# Altium PCB STM32F103ZET6.PCBDOC (part 4 of 4)
Units mil, origin at the board's own origin, x right, y up, seen from the top; angles counter-clockwise.
Board outline 4000 x 2280 mil, 2 copper layers (Top Layer, Bottom Layer); 80 components, 152 nets, 495 pads, 75 vias.
Unrouted connection lines stored in the file: 4.
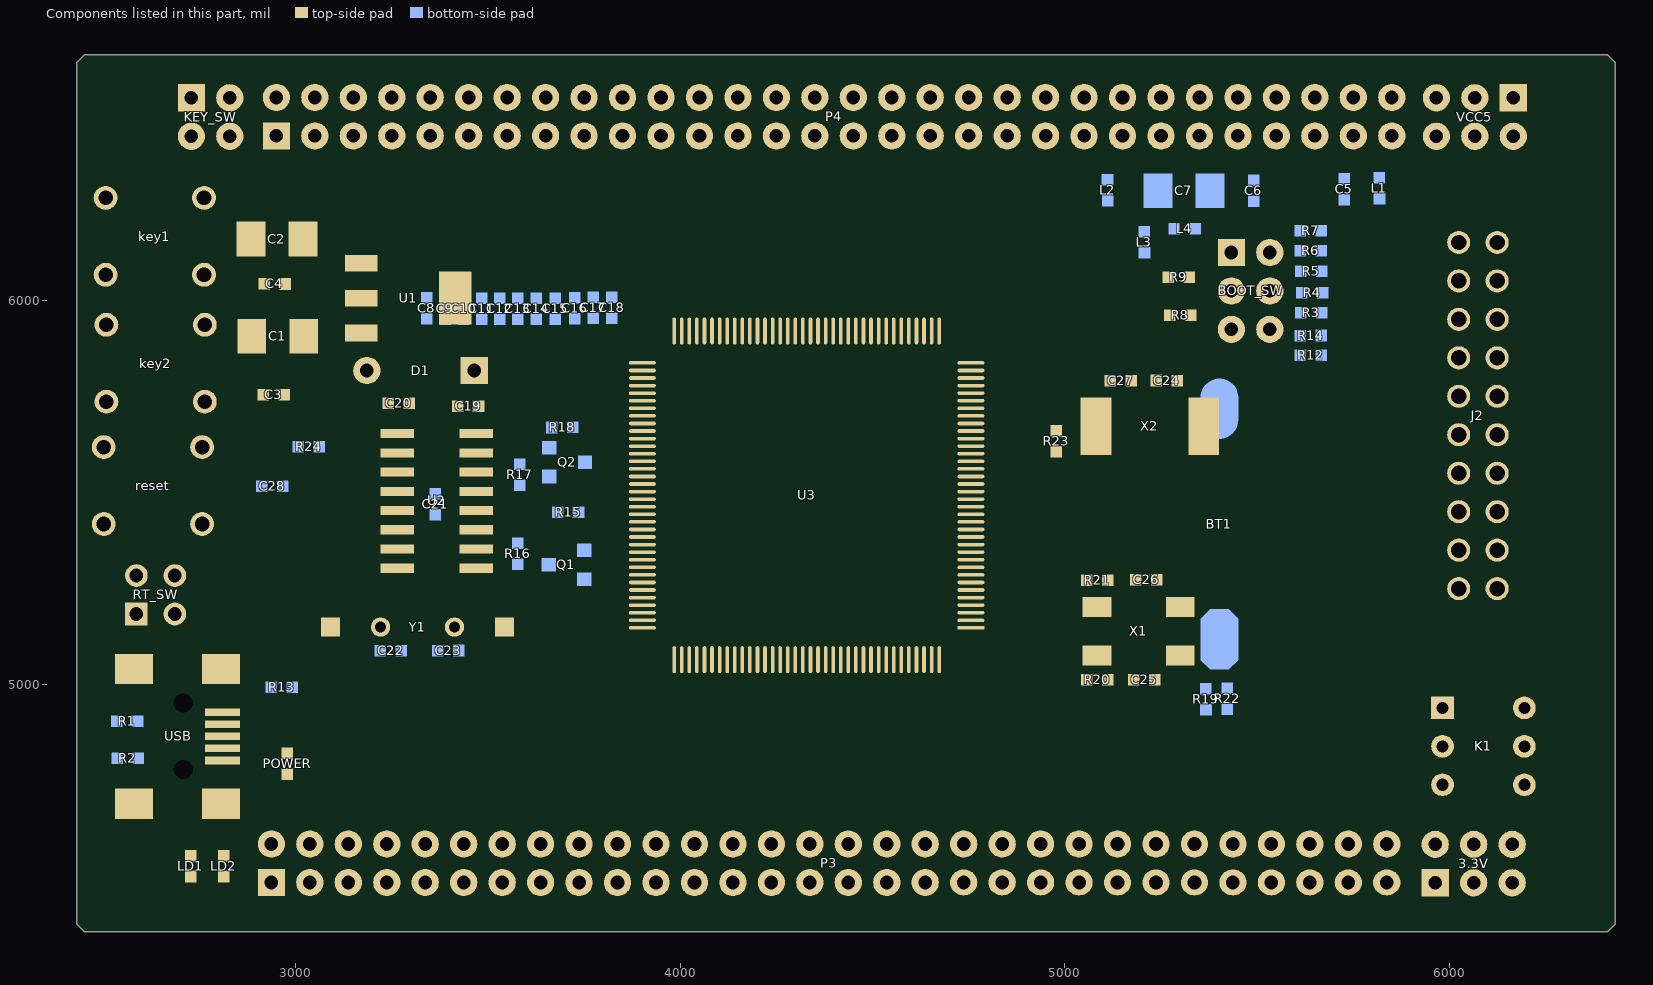
[diagram p4: the components of this part, seen from the top]

## Silkscreen, mask and mechanical layers (free items; w line width, h text height)
Top Overlay:
  drawing of 708 lines, arcs and shapes, not listed
  text "5V" at 6224,6557 h45 r270
  text "GND" at 6225,6462 h45 r270
  text "VREF-/VREF+" at 5340,6369 h40 r270
  text "PD14/PD15" at 3139,6368 h40 r270
  text "PD12/PD13" at 3240,6368 h40 r270
  text "PD10/PD11" at 3339,6368 h40 r270
  text "PB14/PB15" at 3539,6368 h40 r270
  text "PB10/PB11" at 3742,6368 h40 r270
  text "PE14/PE15" at 3839,6368 h40 r270
  text "PE12/PE13" at 3940,6368 h40 r270
  text "PF13/PF14" at 4438,6368 h40 r270
  text "PB12/PB13" at 3637,6367 h40 r270
  text "PE8/PE9" at 4139,6367 h40 r270
  text "PG1/PE7" at 4239,6367 h40 r270
  text "PF15/PG0" at 4339,6367 h40 r270
  text "PB1/BOOT1" at 4640,6367 h40 r270
  text "PC1/PC2" at 5540,6367 h40 r270
  text "PD8/PD9" at 3443,6366 h40 r270
  text "PF10/PC0" at 5640,6366 h40 r270
  text "PG4/5" at 2940,6365 h40 r270
  text "PE10/PE11" at 4042,6365 h40 r270
  text "PF11/PF12" at 4542,6365 h40 r270
  text "PC5/PB0" at 4737,6365 h40 r270
  text "PA7/PC4" at 4841,6365 h40 r270
  text "VDDA/PA0" at 5233,6365 h40 r270
  text "PC3/VSSA" at 5438,6365 h40 r270
  text "PF8/PF9" at 5735,6364 h40 r270
  text "PG2/3" at 3038,6363 h40 r270
  text "PA5/PA6" at 4938,6363 h40 r270
  text "PA3/PA4" at 5039,6361 h40 r270
  text "PA1/PA2" at 5137,6360 h40 r270
  text "5V/GND" at 5832,6359 h40 r270
  text "STM32F103ZET6" at 4640,6123 h118.11 r180
  text "TXD" at 2543,5346 h45
  text "RXD" at 2649,5346 h45
  text "w_kehui" at 6360,5070 h90 r90
  text "2013.6.20" at 6365,4677 h80 r90
  text "PF3/PF2" at 5648,4650 h40 r90
  text "PF5/PF4" at 5749,4649 h40 r90
  text "KEY0/1" at 5848,4649 h40 r90
  text "PG7/PG6" at 3055,4648 h40 r90
  text "PC6/PG8" at 3154,4647 h40 r90
  text "PB5/PB4" at 4746,4647 h40 r90
  text "PF1/PF0" at 5547,4647 h40 r90
  text "PC8/PC7" at 3252,4646 h40 r90
  text "PA8/PC9" at 3355,4646 h40 r90
  text "PA14/PA13" at 3648,4646 h40 r90
  text "PD3/PD2" at 4046,4646 h40 r90
  text "PB9/PB8" at 4948,4646 h40 r90
  text "PC13/PE6" at 5348,4646 h40 r90
  text "PC15/PC14" at 5447,4646 h40 r90
  text "PA10/PA9" at 3451,4645 h40 r90
  text "PA12/PA11" at 3550,4645 h40 r90
  text "PD5/PD4" at 4146,4645 h40 r90
  text "PC10/PA15" at 3750,4644 h40 r90
  text "PC12/PA11" at 3849,4644 h40 r90
  text "PD1/PD0" at 3945,4644 h40 r90
  text "PD7/PD6" at 4246,4644 h40 r90
  text "PG10/PG9" at 4348,4644 h40 r90
  text "PG12/PG11" at 4450,4644 h40 r90
  text "PG14/PG13" at 4545,4644 h40 r90
  text "PB7/PB6" at 4849,4644 h40 r90
  text "PE1/PE0" at 5049,4644 h40 r90
  text "PE3/PE2" at 5149,4644 h40 r90
  text "PE5/PE4" at 5251,4644 h40 r90
  text "PB3/PG15" at 4648,4643 h40 r90
  text "GND" at 6229,4635 h45 r270

## Text inside footprints (layer, text, board x,y; h text height)
KEY_SW: Top Overlay "key2" at 2796,6341 h45; Top Overlay "key1" at 2798,6591 h45
U3: Top Overlay "109" at 3910,5048 h45; Top Overlay "144" at 4689,5045 h45; Top Overlay "108" at 3864,5100 h45; Top Overlay "73" at 3883,5851 h45; Top Overlay "37" at 4695,5909 h45; Top Overlay "36" at 4736,5858 h45; Top Overlay "1" at 4755,5109 h45; Top Overlay "72" at 3926,5908 h45